# Altium PCB Zoom Camera V1.0.PcbDoc
Units mm, origin at the board's own origin, x right, y up, seen from the top; angles counter-clockwise.
Board outline 35 x 35 mm, 2 copper layers (Top Layer, Bottom Layer); 20 components, 41 nets, 189 pads, 0 vias.
Unrouted connection lines stored in the file: 90.
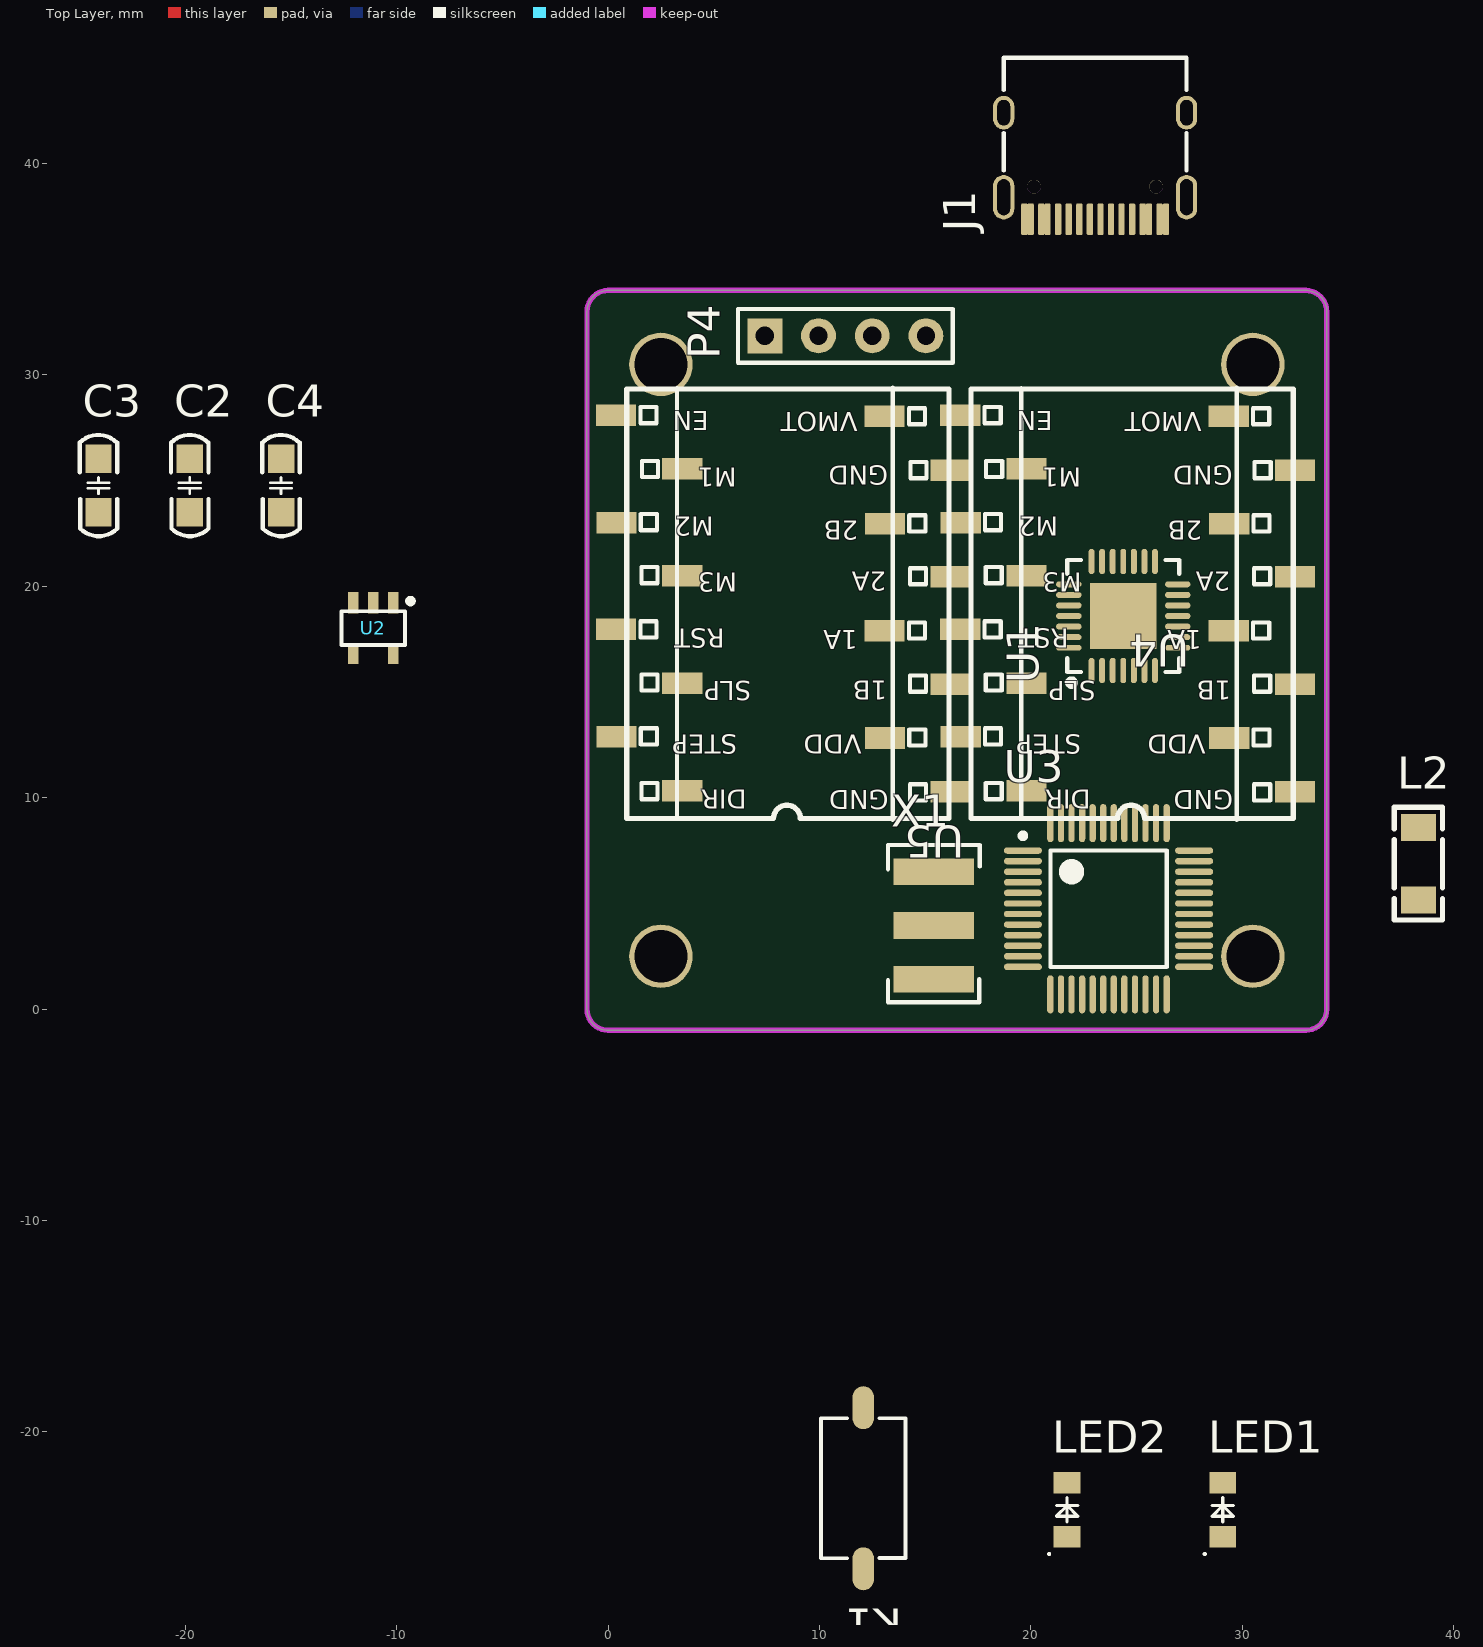
[diagram p0: Top Layer view]
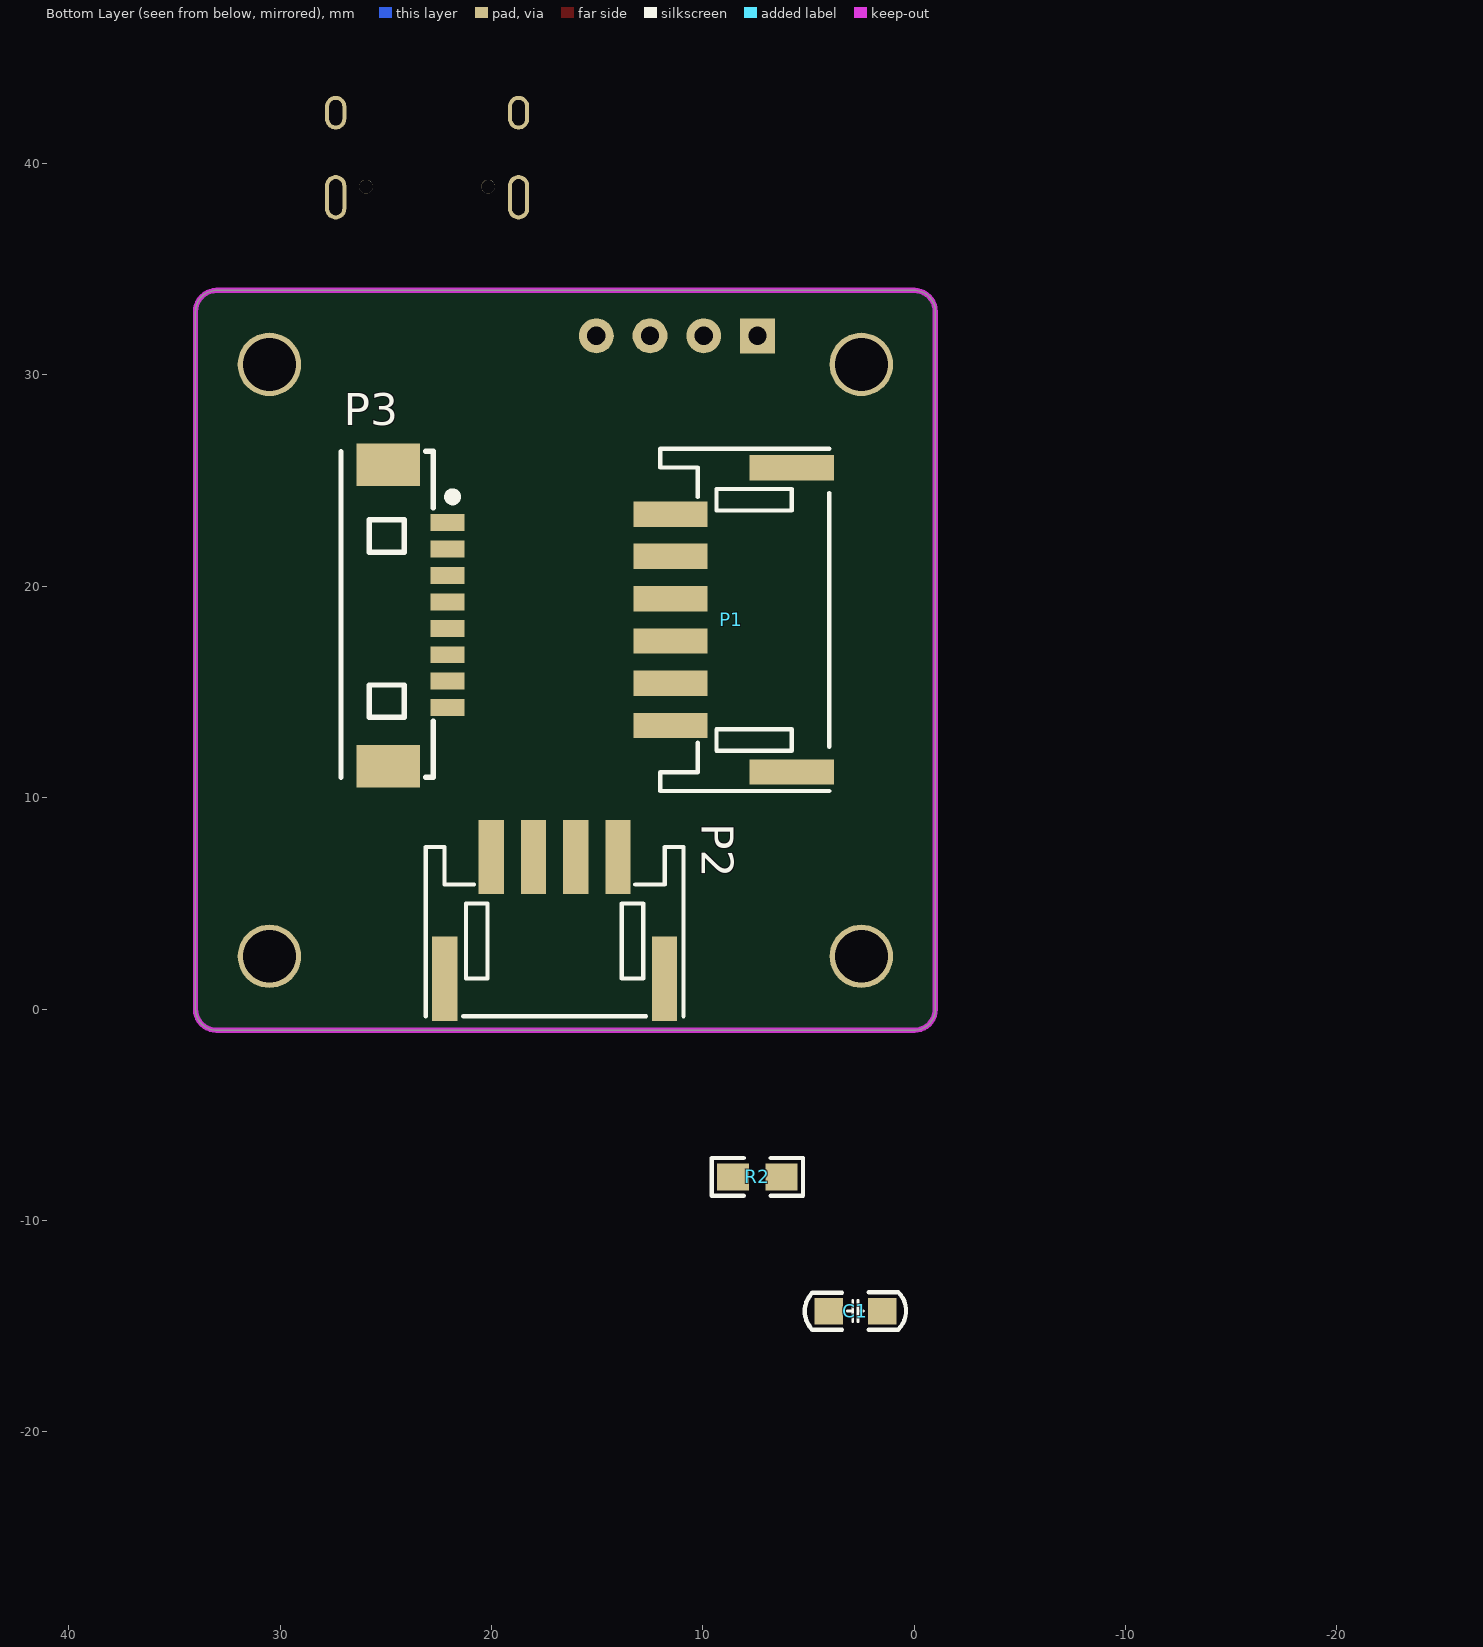
[diagram p1: Bottom Layer view, seen from below]

## Layer stack, top to bottom
Top Solder: solder mask 0.0102, Solder Resist, Dk 3.5
Top Layer: signal copper 0.0356
Dielectric 1: dielectric 0.32, FR-4, Dk 4.8
Bottom Layer: signal copper 0.0356
Bottom Solder: solder mask 0.0102, Solder Resist, Dk 3.5

## Board outline
-1,0 -1,33 cw(c0,33) 0,34 33,34 cw(c33,33) 34,33 34,0 cw(c33,0) 33,-1 0,-1 cw(c0,0)

## Design rules (kind name [scope] priority, off if disabled: settings)
Clearance [All] p1: gap=0.178
ComponentClearance [All] p1: gap=0 collisioncheckmode=3 verticalgap=0 showdistances=FALSE
PolygonConnect [All] p1: connectstyle=Relief reliefconductorwidth=0.254 reliefentries=4 polygonreliefangle="90 Angle" airgapwidth=0.254
RoutingVias [All] p1: holewidth=0.711 width=1.27 viastyle="Through Hole" minholewidth=0.711 minwidth=1.27 maxholewidth=0.711 maxwidth=1.27
SolderMaskExpansion [All] p1: expansion=0.102
Width [All] p1: maxlimit=1.27 minlimit=0.254 preferedwidth=0.508
29 further rules are at their usual default settings.

## Components (designator, comment, footprint, x,y, rotation, side; value= is the part's Value field where it differs from the comment)
C1 "105" 0805C 4.027,-14.17 r180 bottom
C2 "105" 0805C -19.9,23.524 r90 top
C3 "223" 0805C -24.218,23.524 r90 top
C4 "105" 0805C -15.582,23.524 r90 top
J1 "TypeC" "TYPE-C 16P" 22.885,40.742 r90 top
K1 "按键" 贴片按键 12,-19 r270 top
L2 "磁珠" 1206L 38.379,5.207 r90 top
LED1 "Red" 0805LED(GREEN) 29.029,-24.902 r90 top
LED2 "Green" 0805LED(GREEN) 21.663,-24.902 r90 top
P1 "Camera/UART" PH2.0WS-6P 8.153,18.669 r90 bottom
P2 "Camera" PH2.0WS-4P 16.764,3.404 r180 bottom
P3 "变焦步进电机" MX1.25WS-8P 25.146,18.059 r90 bottom
P4 "SWD" "Header 4" 7.391,31.826 r90 top
R2 "1K" 0805R 8.726,-7.947 r180 bottom
U1 "CP2102" QFN-28 22.454,16.688 r90 top
U2 "RT9193-33" SOT23-5 -10.211,19.279 r180 top
U3 "STM32F103C8T6" LQFP-48 23.724,4.75 r0 top
U4 "A4988模块" "A4988 模块(贴片)" 24.562,20.117 r180 top
U5 "A4988模块" "A4988 模块(贴片)" 8.28,20.117 r180 top
X1 "8M" 三脚贴片8M晶振 15.342,6.502 r0 top

## Footprints (in the part's own frame and the unit in brackets; to place one, negate y for a bottom-side part, rotate by r counter-clockwise, add the part's x,y. Pads: shape width x height; smd on the part's side, far side on the other; paste and mask are expansions set on the pad)
0805C [mm]
  rect 1.35x1.25 smd: 1(-0.025,-0.112) 2(2.515,-0.112)
  silkscreen extent -1.15,-1 3.64,0.78, body extent -0.03,-0.75 2.48,0.5, height 0.79
0805LED(GREEN) [mil]
  rect 40x50 smd: 1(-2,-2) 2(98,-2)
  silkscreen extent -36,-22 71,33, body extent 7,-27 87,23, height 43
0805R [mil]
  rect 60x50 smd: 1(6.34,0.5) 2(96.34,0.5)
  silkscreen extent -34,-35 136,36, body extent 2,-25 101,24, height 31
1206L [mil]
  rect 50x65 smd: 1(-1.59,1.89) 2(133.41,1.89)
  silkscreen extent -39,-43 171,47, body extent 3,-28 129,35, height 35
"A4988 模块(贴片)" [mm]
  rect 1.9x1.02 smd: 1(-7.93,9.83) 2(-4.821,7.29) 3(-7.93,4.75) 4(-4.795,2.21) 5(-7.93,-0.33) 6(-4.821,-2.845) 7(-7.93,-5.385) 8(-4.795,-7.925) 9(7.905,-7.979) 10(4.77,-5.439) 11(7.879,-2.899) 12(4.77,-0.384) 13(7.905,2.156) 14(4.77,4.696) 15(7.879,7.236) 16(4.77,9.776)
  silkscreen extent -7.85,-9.28 7.39,11.17, body extent -7.85,-9.3 7.39,11.02, height 12.37
"Header 4" [mil]
  rect 65x65 hole 34: 1(0.95,-0.93)
  round 65 hole 34: 2(0.95,-100.93) 3(0.95,-200.93) 4(0.95,-300.93)
  silkscreen extent -49,-351 51,49, body extent -51,-354 49,46, height 336
LQFP-48 [mm]
  oval 1.8x0.3 smd: 1(-4.101,2.75) 2(-4.101,2.25) 3(-4.101,1.75) 4(-4.101,1.25) 5(-4.101,0.75) 6(-4.101,0.25) 7(-4.101,-0.25) 8(-4.101,-0.75) 9(-4.101,-1.25) 10(-4.101,-1.75) 11(-4.101,-2.25) 12(-4.101,-2.75) 25(3.999,-2.75) 26(3.999,-2.25) 27(3.999,-1.75) 28(3.999,-1.25) 29(3.999,-0.75) 30(3.999,-0.25) 31(3.999,0.25) 32(3.999,0.75) 33(3.999,1.25) 34(3.999,1.75) 35(3.999,2.25) 36(3.999,2.75)
  oval 0.3x1.8 smd: 13(-2.801,-4.05) 14(-2.301,-4.05) 15(-1.801,-4.05) 16(-1.301,-4.05) 17(-0.801,-4.05) 18(-0.301,-4.05) 19(0.199,-4.05) 20(0.699,-4.05) 21(1.199,-4.05) 22(1.699,-4.05) 23(2.199,-4.05) 24(2.699,-4.05) 37(2.699,4.05) 38(2.199,4.05) 39(1.699,4.05) 40(1.199,4.05) 41(0.699,4.05) 42(0.199,4.05) 43(-0.301,4.05) 44(-0.801,4.05) 45(-1.301,4.05) 46(-1.801,4.05) 47(-2.301,4.05) 48(-2.801,4.05)
  silkscreen extent -4.23,-2.75 2.7,3.57, body extent -4.55,-4.5 4.45,4.5, height 1.45
MX1.25WS-8P [mm]
  rect 2x3 smd: 0(-6.564,-0.262) 0(7.7,-0.262)
  rect 0.8x1.6 smd: 1(4.956,-3.072) 2(3.706,-3.072) 3(2.456,-3.072) 4(1.206,-3.072) 5(-0.044,-3.072) 6(-1.294,-3.072) 7(-2.544,-3.072) 8(-3.794,-3.072)
  silkscreen extent -7.1,-3.51 8.33,1.97, body extent -7.03,-3.45 8.12,1.74, height 3.4
PH2.0WS-4P [mm]
  rect 1.2x4 smd: 0(-5.445,-1.962) 0(4.955,-1.962)
  rect 1.2x3.5 smd: 1(-3.245,3.788) 2(-1.245,3.788) 3(0.755,3.788) 4(2.755,3.788)
  silkscreen extent -6.34,-3.73 5.85,4.27, body extent -6.24,-3.61 5.76,4.99, height 5.55
PH2.0WS-6P [mm]
  rect 1.2x4 smd: 0(-7.453,-2.365) 0(6.947,-2.365)
  rect 1.2x3.5 smd: 1(-5.253,3.385) 2(-3.253,3.385) 3(-1.253,3.385) 4(0.747,3.385) 5(2.747,3.385) 6(4.747,3.385)
  silkscreen extent -8.35,-4.14 7.84,3.86, body extent -8.25,-4.01 7.75,4.59, height 5.55
QFN-28 [mm] "CP2102  USB转串口芯片"
  rect 3.13x3.13 smd mask+0.051: 0(1.909,-1.918)
  oval 1.2x0.28 smd mask+0.051: 1(-0.668,-0.418) 2(-0.668,-0.918) 3(-0.668,-1.418) 4(-0.668,-1.918) 5(-0.668,-2.418) 6(-0.668,-2.918) 7(-0.668,-3.418) 15(4.486,-3.418) 16(4.486,-2.918) 17(4.486,-2.418) 18(4.486,-1.918) 19(4.486,-1.418) 20(4.486,-0.918) 21(4.486,-0.418)
  oval 0.28x1.2 smd mask+0.051: 8(0.409,-4.495) 9(0.909,-4.495) 10(1.409,-4.495) 11(1.909,-4.495) 12(2.409,-4.495) 13(2.909,-4.495) 14(3.409,-4.495) 22(3.409,0.66) 23(2.909,0.66) 24(2.409,0.66) 25(1.909,0.66) 26(1.409,0.66) 27(0.909,0.66) 28(0.409,0.66)
  silkscreen extent -1.39,-4.57 4.56,0.73, body extent -0.58,-4.42 4.42,0.58, height 1
SOT23-5 [mm]
  rect 0.5x1 smd: 1(-0.051,0.051) 2(0.899,0.051) 3(1.849,0.051) 4(1.849,2.451) 5(-0.051,2.451)
  silkscreen extent -0.99,-0.15 2.4,2.05, body extent -0.55,-0.15 2.35,2.65, height 1.09
"TYPE-C 16P" [mm] "贴片USB-3.1  4固定插脚"
  round 0.65 hole 0.65: 0(-1.834,2.735) 0(-1.834,-3.045)
  oval 1.6x1 hole 0.6 slot 1.2 at 0 deg: 1(1.666,4.17) 2(1.666,-4.48)
  oval 2.1x1 hole 0.6 slot 1.7 at 0 deg: 3(-2.334,-4.48) 4(-2.334,4.17)
  rrect50% 1.5x0.3 smd: A1(-3.374,-3.505) A4(-3.374,-2.705) A5(-3.374,-1.405) A6(-3.374,-0.405) A7(-3.374,0.095) A8(-3.374,1.095) A9(-3.374,2.395) A12(-3.374,3.195) B1(-3.374,2.895) B4(-3.374,2.095) B5(-3.374,1.595) B6(-3.374,0.595) B7(-3.374,-0.905) B8(-3.374,-1.905) B9(-3.374,-2.405) B12(-3.374,-3.205)
  silkscreen extent -1.07,-4.48 4.27,4.17, body extent -3.45,-4.65 4.45,4.29, height 3.25
三脚贴片8M晶振 [mm] "CSTCC8M00G53-RO"
  rect 3.8x1.27 smd: 1(0.06,-0.006) 2(0.06,-5.086) 3(0.06,-2.546)
  silkscreen extent -2.1,-6.18 2.24,1.26, body extent -1.72,-6.23 1.84,1.26, height 1.5
贴片按键 [mil]
  oval 80x40 smd: 1(-5.71,2.8) 2(294.29,2.8)
  silkscreen extent 14,-76 274,82, body extent 24,-69 264,77, height 98

## Part data
C1 C2 C3 C4: library part Cap1, "无极贴片电容"
K1: library part 贴片按键, "轻触开关"
L2: library part L, "电感"
LED1 LED2: library part LED, "发光二极管"
P1: library part 接线端子-6PIN, "6PIN"
P2: library part 接线端子-4PIN, "4PIN"
P3: library part 接线端子-8PIN
P4: library part "Header 4", "排针"
R2: library part Res, "电阻"
U1: "USB转串口芯片"
U2: library part RT9193
U3: "STM32单片机48引脚"
X1: library part XTAL三脚贴片晶振

## Free pads (board coordinates)
  round 3 hole 2.5: 0(2.5,2.5) 0(2.5,30.5) 0(30.5,2.5) 0(30.5,30.5)

## Nets (pads, with @x,y where several pads share a name; then routed paths per layer and width w, separated by ;. In a path a pad name is that pad's centre, name@x,y a point inside that pad or via, vN(x,y) a via of type N, cw(c..) or ccw(c..) an arc to the next point about the centre after c; other vN are vias at no path point)
3.3V: C4.2 P4.1 R2.2 U1.6 U2.5 U3.9 U3.24 U3.36 U3.48 U4.2 U5.2
5.0V: C1.1 C2.2 J1.A4 J1.A9 J1.B4 J1.B9 P1.1 U1.7 U1.8 U1.9 U2.1 U2.3 U4.8 U5.8
CP_USB_D+: J1.A6 J1.B6 U1.4
CP_USB_D-: J1.A7 J1.B7 U1.5
DGND: C1.2 J1.1 J1.2 J1.3 J1.4 J1.A1 J1.A12 J1.B1 J1.B12 K1.2 L2.1 P1.4 P2.4 P4.4 U1.0 U1.3 U3.8 U3.23 U3.35 U3.44 U3.47 X1.3
FOCUS_A+: P3.3 U5.4
FOCUS_A-: P3.4 U5.5
FOCUS_B+: P3.5 U5.3
FOCUS_B-: P3.6 U5.6
GND: C2.1 C3.1 C4.1 L2.2 LED1.2 U2.2 U4.1 U4.7 U4.9 U5.1 U5.7 U5.9
MS1_1(B6): U3.42 U5.10
MS1_2(B12): U3.25 U4.10
MS2_1(B7): U3.43 U5.11
MS2_2(B13): U3.26 U4.11
MS3_1(B8): U3.45 U5.12
MS3_2(B14): U3.27 U4.12
NetC3_2: C3.2 U2.4
NetLED1_1: LED1.1 LED2.1 R2.1
NetU4_13: U4.13 U4.14
NetU5_13: U5.13 U5.14
NRST: K1.1 U3.7
OSCIN: U3.5 X1.1
OSCOUT: U3.6 X1.2
STEP_1(B9): U3.46 U5.16
STEP_2(B15): U3.28 U4.16
STM32_RXD1: U1.26 U3.31
STM32_RXD2: P1.5 U3.13
STM32_TXD1: U1.25 U3.30
STM32_TXD2: P1.6 U3.12
SWCLK(A14): P4.3 U3.37
SWDIO(A13): P4.2 U3.34
SYS_LED(B0): LED2.2 U3.18
TIM2_CH3(B10): U3.21 U5.15
TIM2_CH4(B11): U3.22 U4.15
USB_DM: P1.2 P2.2
USB_DP: P1.3 P2.3
VDD_5.0V: P2.1
ZOOM_A+: P3.1 U4.4
ZOOM_A-: P3.2 U4.5
ZOOM_B+: P3.8 U4.3
ZOOM_B-: P3.7 U4.6
pads on no net: J1.0 J1.A5 J1.A8 J1.B5 J1.B8 P1.0 P2.0 P3.0 U1.1 U1.2 U1.10 U1.11 U1.12 U1.13 U1.14 U1.15 U1.16 U1.17 U1.18 U1.19 U1.20 U1.21 U1.22 U1.23 U1.24 U1.27 U1.28 U3.1 U3.2 U3.3 U3.4 U3.10 U3.11 U3.14 U3.15 U3.16 U3.17 U3.19 U3.20 U3.29 U3.32 U3.33 U3.38 U3.39 U3.40 U3.41

## Keep-outs
Keep-Out Layer:
  the board outline again, w0.254

## Text inside footprints (layer, text, board x,y; h text height)
U4: Top Overlay "GND" at 29.566,10.668 h1.52 r180; Top Overlay "1B" at 29.489,15.85 h1.52 r180; Top Overlay "1A" at 28.092,18.237 h1.52 r180; Top Overlay "2A" at 29.439,21.006 h1.52 r180; Top Overlay "2B" at 28.118,23.419 h1.52 r180; Top Overlay "GND" at 29.54,26.01 h1.52 r180; Top Overlay "VMOT" at 28.092,28.55 h1.52 r180; Top Overlay "DIR" at 22.835,10.692 h1.52 r180; Top Overlay "STEP" at 22.385,13.277 h1.52 r180; Top Overlay "M3" at 22.403,20.94 h1.52 r180; Top Overlay "M2" at 21.285,23.597 h1.52 r180; Top Overlay "M1" at 22.377,25.908 h1.52 r180; Top Overlay "VDD" at 28.27,13.283 h1.52 r180; Top Overlay "RST" at 21.801,18.296 h1.52 r180; Top Overlay "SLP" at 23.063,15.824 h1.52 r180; Top Overlay "EN" at 21.04,28.6 h1.52 r180
U5: Top Overlay "GND" at 13.284,10.668 h1.52 r180; Top Overlay "1B" at 13.208,15.85 h1.52 r180; Top Overlay "1A" at 11.811,18.237 h1.52 r180; Top Overlay "2A" at 13.157,21.006 h1.52 r180; Top Overlay "2B" at 11.836,23.419 h1.52 r180; Top Overlay "GND" at 13.259,26.01 h1.52 r180; Top Overlay "VMOT" at 11.811,28.55 h1.52 r180; Top Overlay "DIR" at 6.553,10.692 h1.52 r180; Top Overlay "STEP" at 6.103,13.277 h1.52 r180; Top Overlay "M3" at 6.121,20.94 h1.52 r180; Top Overlay "M2" at 5.004,23.597 h1.52 r180; Top Overlay "M1" at 6.096,25.908 h1.52 r180; Top Overlay "VDD" at 11.989,13.283 h1.52 r180; Top Overlay "RST" at 5.52,18.296 h1.52 r180; Top Overlay "SLP" at 6.782,15.824 h1.52 r180; Top Overlay "EN" at 4.758,28.6 h1.52 r180